# Altium PCB DD_Current_Sense.PcbDoc
Units mil, origin at the board's own origin, x right, y up, seen from the top; angles counter-clockwise.
Board outline 6000 x 4000 mil, 2 copper layers (Top Layer, Bottom Layer); 60 components, 30 nets, 169 pads, 12 vias.
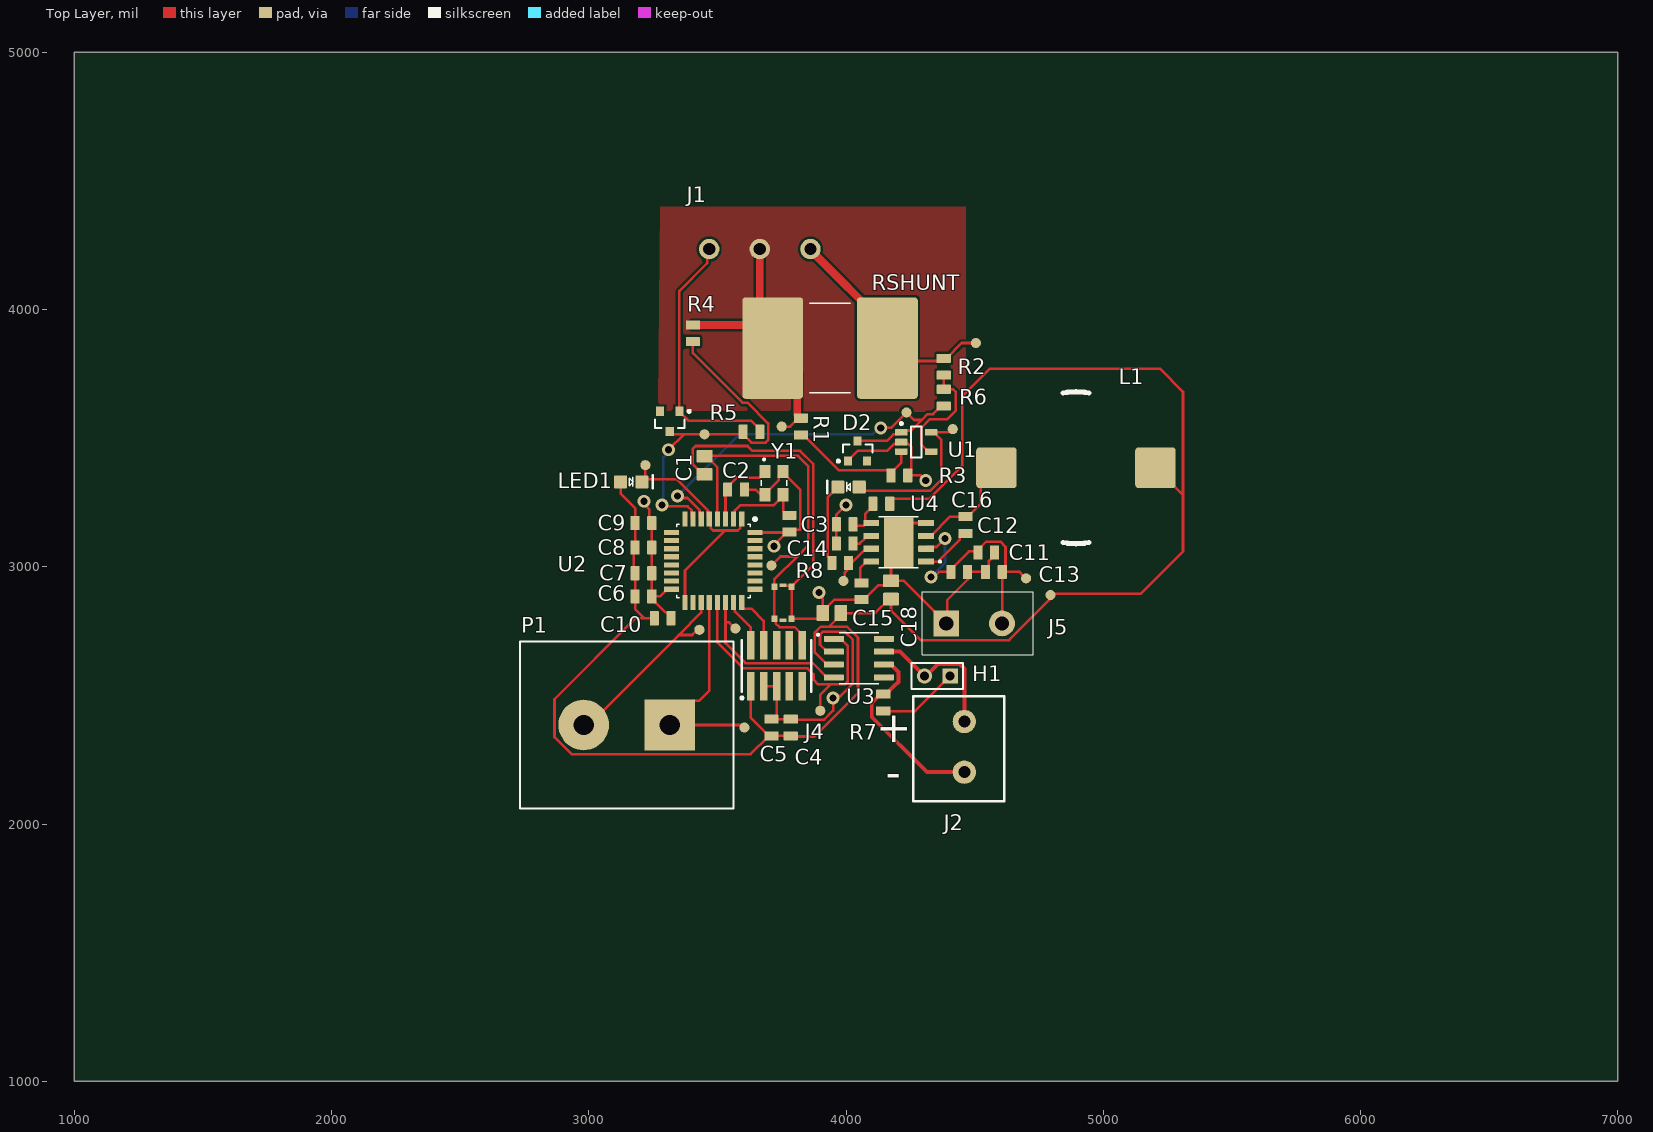
[diagram p0: Top Layer view]
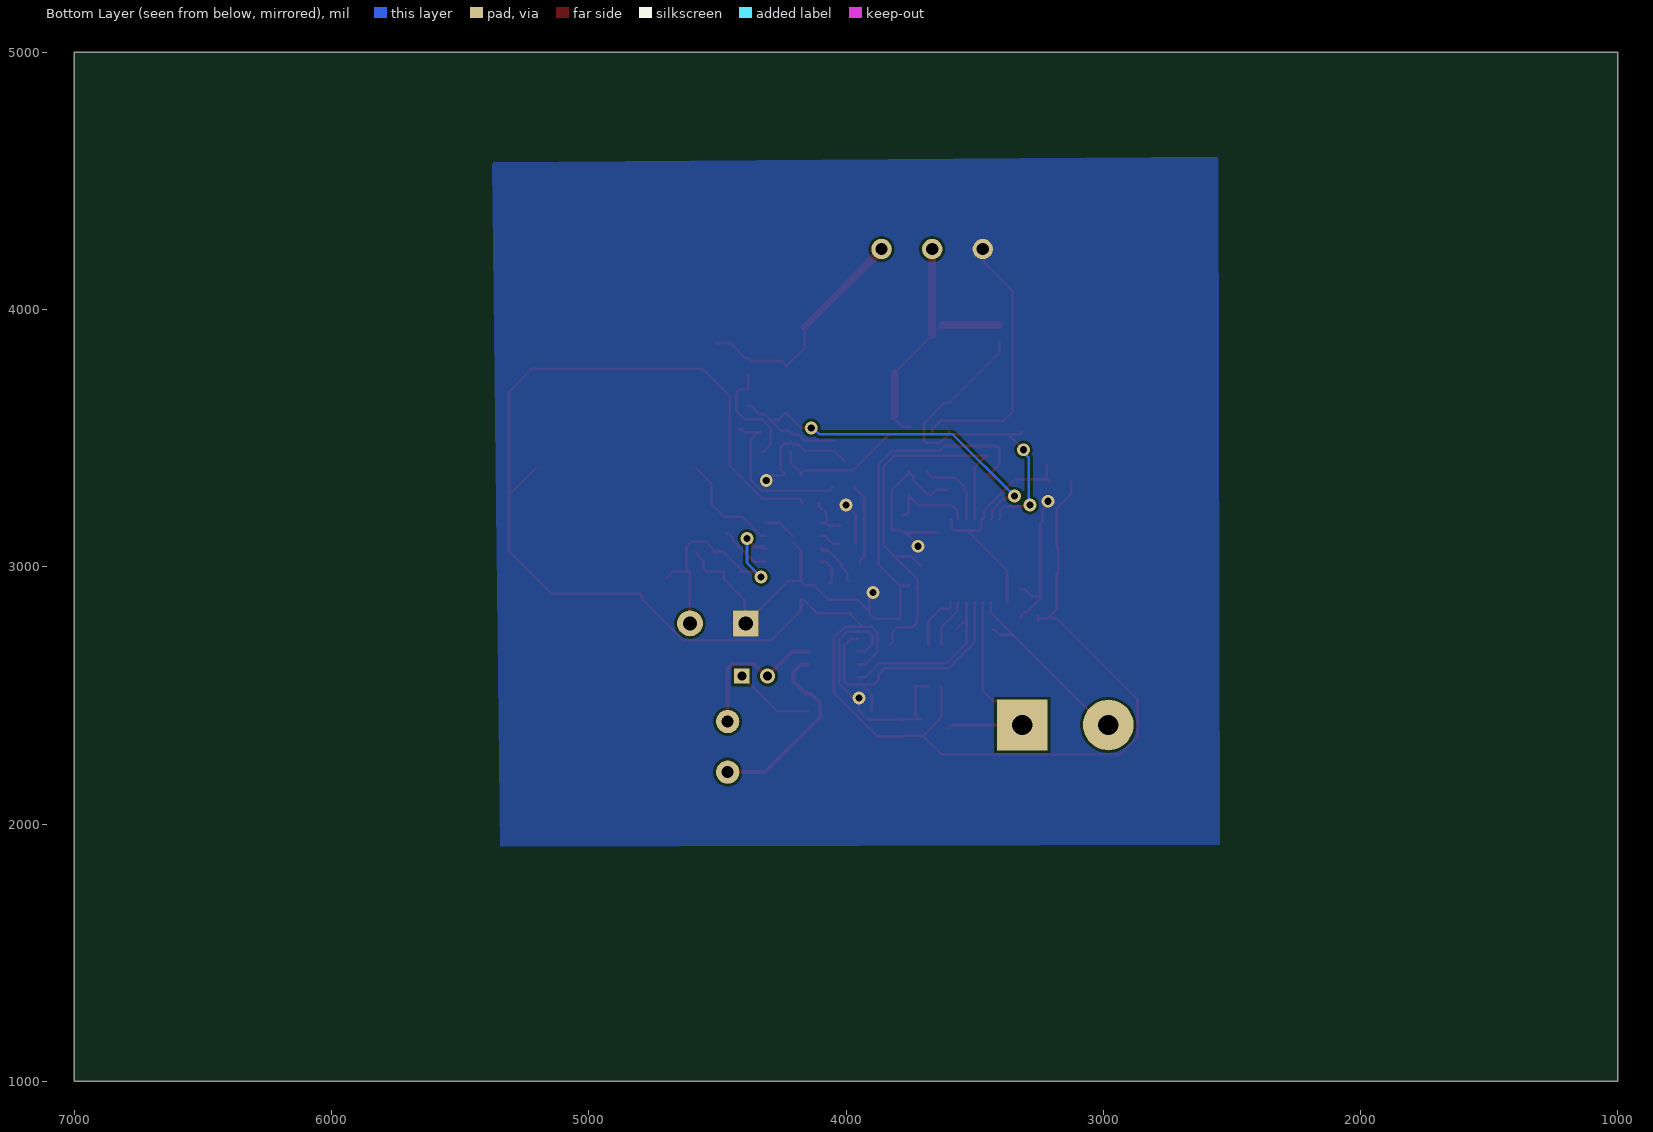
[diagram p1: Bottom Layer view, seen from below]
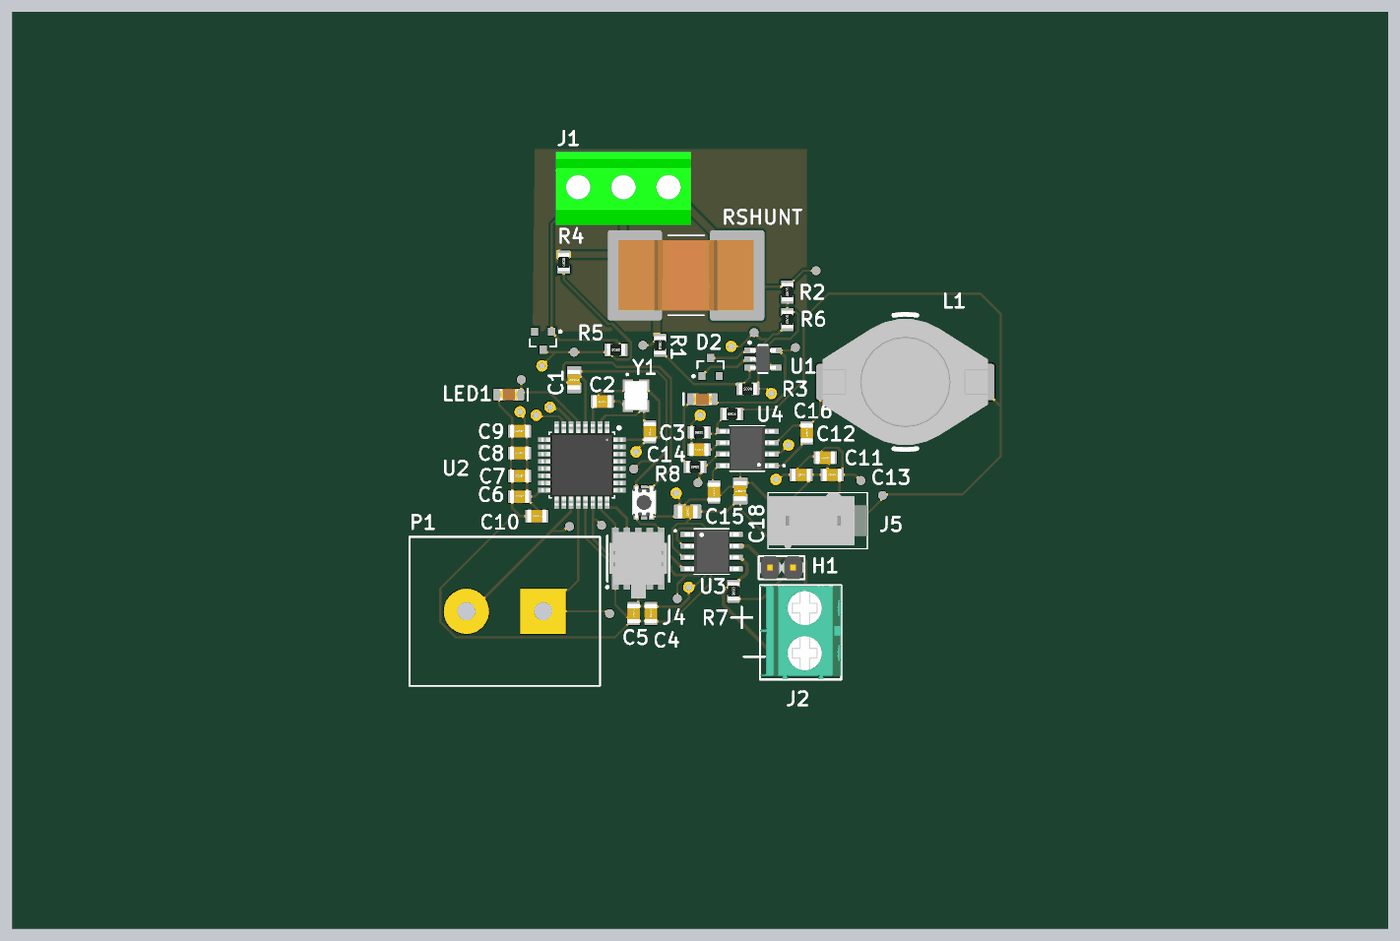
[diagram p2: 3D render of the assembled board from above, using the file's embedded part models]

## Layer stack, top to bottom
Top Solder: solder mask 0.4, Solder Resist, Dk 3.5
Top Layer: signal copper 1.4
Dielectric 1: dielectric 12.6, FR-4, Dk 4.8
Bottom Layer: signal copper 1.4
Bottom Solder: solder mask 0.4, Solder Resist, Dk 3.5

## Board outline
1000,1000 7000,1000 7000,5000 1000,5000

## Design rules (kind name [scope] priority, off if disabled: settings)
Clearance [All] p1: gap=10 ignorepadtopadclearanceinfootprint=FALSE
DiffPairsRouting [All] p1: maxlimit=10 minlimit=10 mostfreqgap=10 toplayer_minwidth=15 toplayer_maxwidth=15 toplayer_prefwidth=15 bottomlayer_minwidth=15 bottomlayer_maxwidth=15 bottomlayer_prefwidth=15 maxuncoupledlength=500
PolygonConnect [InNet('VBAT')] p1: connectstyle=Direct reliefconductorwidth=10 reliefentries=4 polygonreliefangle="90 Angle" airgapwidth=10
RoutingVias [All] p1: holewidth=28 width=50 viastyle="Through Hole" minholewidth=28 minwidth=50 maxholewidth=28 maxwidth=50
SolderMaskExpansion [All] p1: expansion=4 istentingtop=FALSE
SupplyNets "Schematic Supply Nets_5" [InNet('VOUT')] p1: voltage=0.000
SupplyNets "Schematic Supply Nets_4" [InNet('VIN')] p2: voltage=0.000
SupplyNets "Schematic Supply Nets_3" [InNet('5V')] p3: voltage=0.000
SupplyNets "Schematic Supply Nets_2" [InNet('GND')] p4: voltage=0.000
SupplyNets "Schematic Supply Nets_1" [InNet('VBAT')] p5: voltage=0.000
SupplyNets "Schematic Supply Nets" [InNet('3V3')] p6: voltage=0.000
Width [All] p1: maxlimit=10 minlimit=10 preferedwidth=10
29 further rules are at their usual default settings.

## Classes and differential pairs
component class Power: C11 C12 C13 C14 C15 C16 C18 J5 L1 R8 U4
component class MCU: C1 C3 C4 C5 C6 C7 C8 C9 C10 H1 J2 J3 J4 LED1 P1 R7 U2 U3 Y1
component class DD_Current_Sense: D2 J1 R1 R2 R3 R4 R5 R6 RSHUNT U1
differential pair CAN: +CAN_P -CAN_N

## Components (designator, comment, footprint, x,y, rotation, side; value= is the part's Value field where it differs from the comment)
C1 "CAP_0.1uF_50V_0805" CAP2012 3450,3394.76 r90 top value=0.1μF
C2 "CAP_14pF_50V_0805" CAP0805 3572.48,3300 r0 top value=14pF
C3 "CAP_14pF_50V_0805" CAP0805 3780,3167.52 r270 top value=14pF
C4 "CAP_0.1uF_50V_0805" CAP0805 3785,2375 r270 top value=0.1μF
C5 "CAP_0.1uF_50V_0805" CAP0805 3710,2375 r270 top value=0.1μF
C6 "CAP_100nF_50V_0805" CAP0805 3212.48,2885 r0 top value=100nF
C7 "CAP_4.7uF_16V_0805" CAP0805 3212.48,2975 r0 top value=4.7μF
C8 "CAP_100nF_50V_0805" CAP0805 3212.48,3075 r0 top value=100nF
C9 "CAP_100nF_50V_0805" CAP0805 3212.52,3170 r0 top value=100nF
C10 "CAP_1uF_16V_0805" CAP0805 3287.48,2800 r0 top value=1μF
C11 "CAP_10uF_16V_0805" CAP0805 4545,3055 r180 top value=10μF
C12 "CAP_10uF_16V_0805" CAP0805 4440,2980 r180 top value=10μF
C13 "CAP_0.1uF_50V_0805" CAP0805 4575,2980 r0 top value=0.1μF
C14 "CAP_0.47uF_25V_0805" CAP0805 3995,3090 r0 top value=0.47µF
C15 "CAP_8200pF_50V_0805" CAP0805 4060,2905 r90 top
C16 "CAP_0.1uF_50V_0805" CAP0805 4465,3162.52 r270 top value=0.1μF
C17 "CAP_22uF_16V_0805" CAP2012 3945,2820 r180 top value=22μF
C18 "CAP_22uF_16V_0805" CAP2012 4175,2909.76 r90 top value=22μF
D1 "BZX84C5V1LT1G" ONSC-SOT-23-3-318-08_V 3315,3565 r270 top
D2 "BZX84C5V1LT1G" ONSC-SOT-23-3-318-08_V 4045,3450 r90 top
H1 "HEADER" HDR1X2 4405,2575 r180 top
J1 "CONN_TERMINAL_3" WJ127-5.0-3P 3665,4235 r0 top
J2 "CON_2POS_SCREW_TERM" 1935161 4460,2300 r270 top
J4 "CON_PROGRAMMING" FTSH-105-01-F-DV-K-P-TR 3730,2615 r0 top
J5 "CONN_0039293026" 0039293026 4390,2780 r0 top
L1 "IND_2.2uH_9A" IND_BOURNS_SDR1806 4894.05,3385 r0 top
LED1 "LED_RED" LED_0805_RED 3165,3330 r0 top
LED2 "LED_RED" LED_0805_RED 4010,3310 r180 top
P1 "CONN_TERMINAL_2" OSTYK51102030 3147.68,2385 r180 top
R1 "RES_100Ω_0805_1%" RES0805 3825,3545 r270 top value=100Ω
R2 "RES_100Ω_0805_1%" RES0805 4380,3777.48 r90 top value=100Ω
R3 "RES_9.1kΩ_0805_5%" RES0805 4207.52,3355 r180 top value=9.1kΩ
R4 "RES_100kΩ_0805_0.5%" RES0805 3405,3907.48 r90 top value=100kΩ
R5 "RES_9.1kΩ_0805_5%" RES0805 3632.48,3525 r180 top value=9.1kΩ
R6 "RES_9.1kΩ_0805_5%" RES0805 4380,3657.48 r90 top value=9.1kΩ
R7 "RES_120Ω_0805_1%" RES0805 4145,2472.48 r270 top value=120Ω
R8 "RES_10kΩ_0805_5%" RES0805 3977.48,3015 r0 top value=10kΩ
R9 "RES_22.1kΩ_0805_1%" RES0805 3995,3165 r0 top value=22.1kΩ
R10 "RES_73.2kΩ_0805_1%" RES0805 4137.48,3245 r0 top value=73.2kΩ
RSHUNT "RES_1mΩ_5931_1%" RES-5931 3938,3850 r0 top value=1mΩ
S1 "SW_PUSHBUTTON" TACTILE_SWITCH_SMD 3755,2860 r270 top
"TP 1" "TESTPOINT_1MM_CIRCLE" TESTPOINT_CIRCLE_1MM 3750,3545 r90 top
"TP 2" "TESTPOINT_1MM_CIRCLE" TESTPOINT_CIRCLE_1MM 4505,3870 r90 top
"TP 3" "TESTPOINT_1MM_CIRCLE" TESTPOINT_CIRCLE_1MM 3450,3515 r90 top
"TP 4" "TESTPOINT_1MM_CIRCLE" TESTPOINT_CIRCLE_1MM 4415,3535 r90 top
"TP 5" "TESTPOINT_1MM_CIRCLE" TESTPOINT_CIRCLE_1MM 4235,3600 r90 top
"TP 7" "TESTPOINT_1MM_CIRCLE" TESTPOINT_CIRCLE_1MM 3900,2440 r90 top
"TP 8" "TESTPOINT_1MM_CIRCLE" TESTPOINT_CIRCLE_1MM 3570,2760 r90 top
"TP 9" "TESTPOINT_1MM_CIRCLE" TESTPOINT_CIRCLE_1MM 3605,2375 r90 top
"TP 10" "TESTPOINT_1MM_CIRCLE" TESTPOINT_CIRCLE_1MM 3710,3005 r90 top
"TP 11" "TESTPOINT_1MM_CIRCLE" TESTPOINT_CIRCLE_1MM 3220,3395 r90 top
"TP 13" "TESTPOINT_1MM_CIRCLE" TESTPOINT_CIRCLE_1MM 3430,2755 r90 top
"TP 14" "TESTPOINT_1MM_CIRCLE" TESTPOINT_CIRCLE_1MM 4700,2955 r90 top
"TP 16" "TESTPOINT_1MM_CIRCLE" TESTPOINT_CIRCLE_1MM 3990,2945 r90 top
"TP 19" "TESTPOINT_1MM_CIRCLE" TESTPOINT_CIRCLE_1MM 4795,2890 r0 top
U1 "OPAMP_OPA313IDBVR" DBV0005A_M 4273.07,3485 r0 top
U2 "STM32F042K6T6TR" LQFP-32 3484.25,3023 r270 top
U3 "TCAN332DR" SOIC127P599X175-8N 4050,2645 r0 top
U4 "TPS54339" VREG_LM5017MR/NOPB 4205,3095 r180 top
Y1 "CRYSTAL_25MHZ_20PF" XTAL_ECS-250-20-33-CKM-TR 3720,3325 r270 top

## Footprints (in the part's own frame and the unit in brackets; to place one, negate y for a bottom-side part, rotate by r counter-clockwise, add the part's x,y. Pads: shape width x height; smd on the part's side, far side on the other; paste and mask are expansions set on the pad)
1935161 [mm] "TERM BLK 2POS SIDE ENTRY 5MM PCB"
  round 2.3 hole 1.2: 1(-2.5,0) 2(2.5,0)
  silkscreen extent -5.01,-5.06 5.39,3.94, body extent -5.01,-5.06 5.39,3.94, height 11.41
0039293026 [mm]
  rect 2.55x2.55 hole 1.4: 1(0,0)
  round 2.55 hole 1.4: 2(5.5,0)
  silkscreen extent -2.4,-3.1 8.6,3.1, body extent -2.4,-3.1 8.6,3.1, height 12.8
CAP0805 [mm] "Chip Capacitor, Body 2.0x1.2mm, Height 0.45mm, IPC Medium Density"
  rrect15% 0.9x1.4 smd: 1(-0.825,0) 2(0.825,0)
  body extent -1.1,-0.73 1.1,0.73, height 1.39
CAP2012 [mm]
  rrect20% 1.25x1.6 smd: 1(-0.895,0) 2(0.895,0)
  body extent -1.1,-0.7 1.1,0.75, height 1.41
DBV0005A_M [mm] "SOT23, 5-Leads, Body 3.05x1.75mm, Pitch 0.95mm, IPC Low Density"
  rrect15% 1.2x0.65 smd: 1(-1.475,0.95) 2(-1.475,0) 3(-1.475,-0.95) 4(1.475,-0.95) 5(1.475,0.95)
  silkscreen extent -1.6,-1.55 0.5,1.95, body extent -1.42,-1.46 1.42,1.46, height 1.08
FTSH-105-01-F-DV-K-P-TR [mil] "Samtec programming header 10 positions"
  rect 29x110 smd mask+2: 1(-100,-80) 2(-100,80) 3(-50,-80) 4(-50,80) 5(0,-80) 6(0,80) 7(50,-80) 8(50,80) 9(100,-80) 10(100,80)
  silkscreen extent -140,-130 135,100, body extent -125,-175 125,115, height 276
HDR1X2 [mm] "Connector; Header; 2 Position"
  rect 1.5x1.5 hole 0.9: 1(0,0)
  round 1.5 hole 0.9: 2(2.54,0)
  silkscreen extent -1.27,-1.27 3.81,1.27, body extent -1.27,-1.27 3.81,1.27, height 6.35
IND_BOURNS_SDR1806 [mm]
  rrect15% 4x4 smd mask+0.2: 1(-7.85,0) 2(7.85,0)
  silkscreen extent -1.27,-7.5 1.27,7.5, body extent -9.15,-7 9.15,7, height 6.6
LED_0805_RED [mm] "SMD, 2-Leads, Body 2x1.25mm"
  rrect20% 1.3x1.3 smd: 1(-1.05,0) 2(1.05,0)
  silkscreen extent -0.18,-0.64 2.11,0.64, body extent -1,-0.62 1,0.63, height 1.12
LQFP-32 [mil]
  rect 58x20 smd paste+0 mask+0: 1(-162,110.24) 2(-162,78.74) 3(-162,47.24) 4(-162,15.75) 5(-162,-15.75) 6(-162,-47.24) 7(-162,-78.74) 8(-162,-110.24) 17(162,-110.24) 18(162,-78.74) 19(162,-47.24) 20(162,-15.75) 21(162,15.75) 22(162,47.24) 23(162,78.74) 24(162,110.24)
  rect 20x58 smd paste+0 mask+0: 9(-110.24,-162) 10(-78.74,-162) 11(-47.24,-162) 12(-15.75,-162) 13(15.75,-162) 14(47.24,-162) 15(78.74,-162) 16(110.24,-162) 25(110.24,162) 26(78.74,162) 27(47.24,162) 28(15.75,162) 29(-15.75,162) 30(-47.24,162) 31(-78.74,162) 32(-110.24,162)
  silkscreen extent -168,-143 143,168, body extent -177,-177 177,177, height 63
ONSC-SOT-23-3-318-08_V [mm] "SOT23, 3-Leads, Body 2.92x1.3mm, Pitch 0.95mm"
  rect 0.9x0.8 smd: 1(-1,0.95) 2(-1,-0.95) 3(1,0)
  silkscreen extent -1.12,-1.46 0.65,2.03, body extent -0.65,-1.46 0.65,1.46, height 1.11
OSTYK51102030 [mm] "Connector; Header; 2 Position"
  rect 5x5 hole 2: 1(-4.25,0)
  round 5 hole 2: 2(4.25,0)
  silkscreen extent -10.55,-8.25 10.55,8.25
RES0805 [mm] "Chip Resistor, 2-Leads, Body 2.00x1.25mm, IPC High Density"
  rrect15% 0.9x1.4 smd: 1(-0.825,0) 2(0.825,0)
  body extent -1,-0.62 1,0.63, height 0.61
RES-5931 [mm]
  rrect10% 6x10 smd paste+0 mask+0: 1(-5.664,0) 2(5.664,0)
  silkscreen extent -2,-4.43 2,4.43, body extent -7.5,-3.87 7.5,3.88, height 2.36
SOIC127P599X175-8N [mm]
  rrect25% 1.97x0.6 smd: 1(-2.47,1.905) 2(-2.47,0.635) 3(-2.47,-0.635) 4(-2.47,-1.905) 5(2.47,-1.905) 6(2.47,-0.635) 7(2.47,0.635) 8(2.47,1.905)
  silkscreen extent -4.14,-2.52 1.95,2.52, body extent -3,-2.45 3,2.45, height 1.75
TACTILE_SWITCH_SMD [mm]
  rrect15% 0.65x0.6 smd: 1(-1.575,0.85) 2(1.575,0.85) 3(-1.575,-0.85) 4(1.575,-0.85)
  rrect15% 0.35x0.7 smd: 5(-1.725,0) 6(1.725,0)
  body extent -1.75,-1.35 1.75,1.35, height 1.6
TESTPOINT_CIRCLE_1MM [mm]
  round 1 smd: 1(0,0)
VREG_LM5017MR/NOPB [mm]
  rrect5% 1.55x0.6 smd mask+0: 1(-2.7,1.905) 2(-2.7,0.635) 3(-2.7,-0.635) 4(-2.7,-1.905) 5(2.7,-1.905) 6(2.7,-0.635) 7(2.7,0.635) 8(2.7,1.905)
  rect 2.95x4.9 smd paste-3 mask+0: 9(0,0)
  silkscreen extent -4.17,-2.52 1.95,2.52, body extent -3,-2.45 3,2.45, height 1.7
WJ127-5.0-3P [mm] "3 pin screw terminal"
  round 2.02 hole 1.2: 1(-5,0) 2(0,0) 3(5,0)
  body extent -7.5,-4.22 7.5,3.88, height 10.1
XTAL_ECS-250-20-33-CKM-TR [mm]
  rect 1.3x1.1 smd: 1(-1.15,-0.9) 2(1.15,-0.9) 3(1.15,0.9) 4(-1.15,0.9)
  silkscreen extent -2.45,-1.25 0.27,1.25, body extent -1.62,-1.25 1.58,1.25, height 0.8

## Part data
C1 C4 C5 C13 C16: "CAP CER 0.1UF 50V X7R 0805", Dielectric=X7R, LCSC Part #=C49678, Manufacturer 1="Murata Electronics", Manufacturer Part Number 1=GCM21BR71H104KA37K, Package/Footprint=0805, Supplier Part Number 1=490-8049-1-ND, Voltage Rating=50V, Mounting Type=SMD, Supplier 1=Digi-Key
C2 C3: "CERAMIC CAP MLCC HIGH-Q 125C", Manufacturer="Murata Electronics", Manufacturer Part Number=GQM2195C2E140JB12D, Package=0805, Supplier Part Number 1=490-GQM2195C2E140JB12DCT-ND, Voltage Rating=250V, Mounting Type=SMD, Supplier 1=Digi-Key
C6 C8 C9: "CAP CER 0.1UF 50V X7R 0805", Manufacturer 1="Samsung Electro-Mechanics", Manufacturer Part Number 1=CL21B104KBCNNNC, Package/Footprint=0805, Supplier Part Number 1=1276-1003-1-ND, Voltage Rating=50V, Supplier 1=Digi-Key
C7: "CAP CER 4.7UF 16V X5R 0805", Dielectric=X5R, LCSC Part #=C1779, Manufacturer 1="Samsung Electro-Mechanics", Manufacturer Part Number 1=CL21A475KOFNNNE, Package=0805, Supplier Part Number 1=1276-1065-1-ND, Voltage Rating=16V, Mounting Type=SMD, Supplier 1=Digi-Key
C10: "CAP CER 1UF 16V X7R 0805", Dielectric=X7R, Manufacturer 1=Yageo, Manufacturer Part Number 1=CC0805KKX7R7BB105, Package=0805, Supplier Part Number 1=311-1365-1-ND, Voltage Rating=16V, Mounting Type=SMD, Supplier 1=Digi-Key
C11 C12: "CAP CER 10UF 16V X5R 0805", Dielectric=X5R, Manufacturer 1=Yageo, Manufacturer Part Number 1=CC0805KKX5R7BB106, Package/Footprint=0805, Supplier Part Number 1=311-1865-1-ND, Voltage Rating=16V, Mounting Type=SMD, Supplier 1=Digi-Key
C14: "CAP CER 0.47UF 25V X5R 0805", Manufacturer 1=KEMET, Manufacturer Part Number 1=C0805C474K3PAC7800, Package=0805, Supplier Part Number 1=399-15508-1-ND, Voltage Rating=25V, Supplier 1=Digi-Key
C15: "CAP CER 8200PF 50V X7R 0805", Capacitance=8200pF, Dielectric=X7R, Manufacturer=YAGEO, Manufacturer Part Number=CC0805KRX7R9BB822, Package=0805, Supplier Part Number 1=311-4331-1-ND, Voltage Rating=50V, Mounting Type=SMD, Supplier 1=Digi-Key
C17 C18: "CAP CER 22UF 16V X5R 0805", Dielectric=X5R, Manufacturer 1="Murata Electronics", Manufacturer Part Number 1=GRM219R61C226ME15L, Package/Footprint=0805, Supplier Part Number 1=490-9952-1-ND, Voltage Rating=16V, Mounting Type=SMD, Supplier 1=Digi-Key
D1 D2: library part CMP-1060-00946-1, "Zener Voltage Regulator, 225 mW, 3-Pin SOT-23, Pb-Free, Tape and Reel", Manufacturer="On Semiconductor", ComponentLink1Description="Manufacturer URL", ComponentLink1URL=http://www.onsemi.com/, ComponentLink2Description=Datasheet, ComponentLink2URL=http://www.onsemi.com/pub_link/Collateral/BZX84C2V4LT1-D.PDF, ComponentLink3Description="Package Specification", ComponentLink3URL=http://www.onsemi.cn/pub_link/Collateral/318-08.PDF, DatasheetVersion="Rev. 17", Mounting Technology="Surface Mount", PackageDescription="3-Pin Small Outline Transistor, Body 2.92 x 1.3 mm, Pitch 0.95 mm", PackageReference=SOT-23-3-318-08, PackageVersion="Rev. AP, 11/2009", Packing="Tape and Reel", PartNumber=BZX84C5V1LT1G, RoHS=Pb-Free
H1: "HEADER 2X1", Manufacturer 1="Harwin Inc.", Manufacturer Part Number 1=M20-9990246, Package/Footprint=TH, Supplier Part Number 1=952-2262-ND, Mounting Type=TH, Supplier 1=Digi-Key
J1: "Header, 3-Pin", LCSC Number=C8393, Manufacturer 1="Ningbo Kangnex", Manufaturer Part Number 1=WJ127-5.0-3P, Datasheet=https://datasheet.lcsc.com/lcsc/2107141401_Ningbo-Kangnex-Elec-WJ127-5-0-3P_C8393.pdf, Supplier 1=LCSC
J2: "TERM BLK 2POS SIDE ENTRY 5MM", Manufacturer 1="Phoenix Contact", Manufacturer Part Number 1=1935161, Package/Footprint=SMD, Supplier Part Number 1=277-1667-ND, Mounting Type=TH, Supplier 1=Digi-Key
J4: "CONN HEADER SMD 10POS 1.27MM", Manufacturer 1=Samtec, Manufacturer Part Number 1=FTSH-105-01-F-DV-K, Supplier Part Number 1=SAM8796-ND, Mounting Type=SMD, Pitch=1.27mm, Supplier 1=Digi-Key
J5: "CONN HEADER VERT 2POS MINI-FIT", Manufacturer 1=Molex, Manufacturer Part Number 1=0039293026, Package/Footprint=TH, Supplier Part Number 1=WM3843-ND, Family="Mini-Fit Jr", Mounting Type=TH, Supplier 1=Digi-Key, Verified=No
L1: "INDUCTOR 2.2UH 9A 6.8 MOHM SMD", Current Rating=9A, DC Resistance (DCR)=6.8mOhm, Inductance=2.2μH, Manufacturer 1=Bourns, Manufacturer Part Number 1=SDR1806-2R2ML, Supplier Part Number 1=SDR1806-2R2MLCT-ND, Mounting Type=SMD, Supplier 1=Digi-Key
LED1 LED2: "LED RED DIFFUSED 0805 SMD", Forward Current=20mA, Forward Voltage Drop=2V, Manufacturer 1=OSRAM, Manufacturer Part Number 1="LS R976-NR-1", Package/Footprint=0805, Supplier Part Number 1=475-1278-1-ND, Mounting Type=SMD, Supplier 1=Digi-Key
P1: "Header, 2-Pin", Manufacturer 1="On Shore Technology Inc.", Manufacturer Part Number 1=OSTYK51102030, Supplier Part Number 1=ED2953-ND, Supplier 1=Digi-Key
R1 R2: "RES 100 OHM 1% 1/8W 0805", LCSC Part #=C1790, Manufacturer 1="Vishay Dale", Manufacturer Part Number 1=CRCW0805100RFKEA, Package/Footprint=0805, Supplier Part Number 1=541-100CCT-ND, Mounting Type=SMD, Supplier 1=Digi-Key
R3 R5 R6: "RES 9.1K OHM 5% 1/8W 0805", Manufacturer 1=Yageo, Manufacturer Part Number 1=RC0805JR-079K1L, Package=0805, Supplier Part Number 1=311-9.1KARCT-ND, Tolerance=5%, Supplier 1=Digi-Key
R4: "RES 100K OHM 0.5% 1/8W 0805", Manufacturer 1=Panasonic, Manufacturer Part Number 1=ERA-6AED104V, Supplier Part Number 1=P123795CT-ND, Supplier 1=Digi-Key
R7: "RES 120 OHM 1% 1/8W 0805", LCSC Part #=C17437, Manufacturer 1=Vishay, Manufacturer Part Number 1=CRCW0805120RFKEA, Package/Footprint=0805, Supplier Part Number 1=541-120CCT-ND, Mounting Type=SMD, Supplier 1=Digi-Key
R8: "RES 10K OHM 5% 1/8W 0805", LCSC Part #=C17414, Manufacturer 1="Panasonic Electronic Components", Manufacturer Part Number 1=ERJ-6GEYJ103V, Package/Footprint=0805, Supplier Part Number 1=P10KACT-ND, Mounting Type=SMD, Supplier 1=Digi-Key
R9: "RES 22.1K OHM 1% 1/8W 0805", Manufacturer 1="Vishay Dale", Manufacturer Part Number 1=CRCW080522K1FKEA, Supplier Part Number 1=541-22.1KCCT-ND, Supplier 1=Digi-Key
R10: "RES 73.2K OHM 1% 1/8W 0805", Manufacturer 1=Yageo, Manufacturer Part Number 1=RC0805FR-0773K2L, Package/Footprint=0805, Supplier Part Number 1=311-73.2KCRCT-ND, Mounting Type=SMD, Supplier 1=Digi-Key
RSHUNT: "RES 0.001 OHM 1% 10W 5931", Manufacturer 1="Vishay Dale", Manufacturer Part Number 1=WSLP59311L000FEA, Package=5931, Supplier Part Number 1=541-10012-1-ND, Mounting Type=SMD, Supplier 1=Digi-Key
S1: "SMT 3.0 X 2.6 MM TACT SWITCH WIT", Manufacturer 1="Würth Elektronik", Manufacturer Part Number 1=435151014824, Supplier Part Number 1=732-435151014824CT-ND, Supplier 1=Digi-Key
"TP 1" "TP 2" "TP 3" "TP 4" "TP 5" "TP 7" "TP 8" "TP 9" "TP 10" "TP 11" "TP 13" "TP 14" "TP 16" "TP 19": "TESTPOINT 1MM CIRCLE"
U1: "IC OPAMP GP 1 CIRCUIT SOT23-5", Manufacturer 1="Texas Instruments", Manufacturer Part Number 1=OPA313IDBVR, Package=SOT-23-5, Supplier Part Number 1=296-35607-1-ND, Mounting Type=SMD, Supplier 1=Digi-Key, Verified=No
U2: "ARM® Cortex®-M0 STM32F0 Microcontroller IC 32-Bit Single-Core 48MHz 32KB (32K x 8) FLASH 32-LQFP (7x7)", Mfr_Name=STMicroelectronics, Operating Temperature="-40°C ~ 85°C (TA)", Package / Case=32-LQFP, Supplier Part Number 1=16AC3527, Voltage - Supply (Vcc/Vdd)="2V ~ 3.6V", ComponentLink1Description=digikey, ComponentLink1URL=https://www.digikey.com/en/products/detail/stmicroelectronics/STM32F042K6T6TR/10414582, Core Processor="ARM® Cortex®-M0", Core Size="32-Bit Single-Core", Program Memory Size="32KB (32K x 8)", Speed=48MHz, Supplier 1=Avnet
U3: "IC CAN TRANSCEIVER", Manufacturer 1="Texas Instruments", Supplier Part Number 1=296-43711-1-ND, Manufacturer Part Number 1=TCAN332DR, Supplier 1=Digi-Key
U4: "IC REG BUCK ADJUSTABLE 3A 8SOPWR", Input Voltage (Max)=23V, Input Voltage (Min)=4.5V, Manufacturer 1="Texas Instruments", Manufacturer Part Number 1=TPS54339DDAR, Output Current=3A, Output Voltage (Max)=7V, Output Voltage (Min/Fixed)=0.76V, Package=8-PowerSOIC, Supplier Part Number 1=296-35686-1-ND, Switching Frequency=600kHz, Supplier 1=Digi-Key
Y1: "CRYSTAL 25.0000MHZ 20PF SMD", Frequency=25MHz, Load Capacitance=20pF, Manufacturer 1="ECS Inc.", Manufacturer Part Number 1=ECS-250-20-33-CKM-TR, Package/Footprint=SMD, Supplier Part Number 1=XC1817CT-ND, Mounting Type=SMD, Supplier 1=Digi-Key

## Via types
v1: diameter 50, hole 28, Top Layer to Bottom Layer, 12 vias

## Nets (pads, with @x,y where several pads share a name; then routed paths per layer and width w, separated by ;. In a path a pad name is that pad's centre, name@x,y a point inside that pad or via, vN(x,y) a via of type N, cw(c..) or ccw(c..) an arc to the next point about the centre after c; other vN are vias at no path point)
3V3: "TP 19.1" C4.2 C5.2 C6.1 C7.1 C8.1 C9.1 C10.1 C17.1 C18.1 J4.1 L1.2 LED1.1 R10.2 U3.3 | length 7376.2
  Top Layer w10: LED1.1@3125,3331.34 LED1.1 3123.66,3284.18 3180.04,3227.8 C9.1 ; C7.1@3175,2975 C7.1@3180,2970 ; C7.1@3175,2980 3175,3075 C8.1@3180.02,3080.02 ; C7.1 C7.1@3180,2970 ; C8.1 C9.1 ; C10.1@3255,2790.16 C10.1 ; C10.1@3255,2809.84 C10.1 ; J4.1 3630,2412.68 C5.2@3700.16,2342.52 ; U3.3 3925.79,2620 3878.98,2666.81 3878.98,2744.58 3901.21,2766.81 3930,2766.81 ; C17.1 4113.58,2820 4168.11,2874.53 C18.1 4175,2830 4290.2,2714.8 4633.54,2714.8 4789.38,2870.64 4789.38,2876.43 4795,2882.05 4795,2890 4800,2895 5145,2895 5310,3060 5310,3278.11 ; C17.1@3983.68,2816.56 3933.94,2766.81 3930,2766.81 ; R10.2 4169.96,3252.18 4182.68,3264.9 4324.75,3264.9 4451.09,3391.24 4451.09,3661.09 4560,3770 5220,3770 5310,3680 5310,3278.11 ; L1.2 5310,3278.11 ; C7.1@3180,2970 C6.1 3180,2835 3215,2800 ; 3215,2800 3181.93,2800 2866.93,2485 2866.93,2338.02 2933.37,2271.57 3629.21,2271.57 C5.2@3700.16,2342.52 ; 3215,2800 C10.1 ; C5.2@3700.16,2342.52 C5.2 3775,2342.52 3780,2337.52 C4.2 3787.48,2340.04 3877.38,2340.04 4046.54,2509.2 4046.54,2724.58 4004.3,2766.81 3930,2766.81
5V: "TP 4.1" LED2.1 U1.5 | length 627.5
  Top Layer w10: LED2.1 4066.34,3295 4326.57,3295 4369.76,3338.2 4369.76,3450 4370,3450.24 4370,3494.37 U1.5@4341.97,3522.4 ; U1.5 U1.5@4341.97,3522.4 ; 4415,3535 4407.05,3535 4394.45,3522.4 U1.5@4341.97,3522.4
CAN_N: J2.2 R7.1 U3.6 | length 769.7
  Top Layer w15: U3.6 4174.21,2620 4203.52,2590.69 4203.52,2552.67 4187.24,2536.39 4186.27,2536.39 4154.84,2504.96 R7.1 ; R7.1@4166.03,2509.96 4150,2509.96 R7.1 ; J2.2 4314.96,2201.57 4099.94,2416.59 4099.94,2469.74 4135.16,2504.96 R7.1
CAN_P: H1.2 J2.1 U3.7 | length 584.5
  Top Layer w15: U3.7 4210,2670 H1.2 4310.36,2575 4357.38,2622.03 4441.78,2622.03 4460,2603.8 J2.1
CAN_RX: "TP 7.1" U2.21 U3.1 | length 1069.6
  Top Layer w10: U2.21 3500,2706 3601,2605 3850.71,2605 3873.76,2581.95 3873.76,2561.24 3891.81,2543.19 3940,2543.19 ; 3900,2440 3900,2503.19 3940,2543.19 ; U3.1 3979.72,2720 4006.54,2693.19 4006.54,2553.71 3996.02,2543.19 3940,2543.19
CAN_TX: "TP 8.1" U2.22 U3.4 | length 683
  Top Layer w10: U2.22 3531.5,2784.23 ; 3570,2760 3569.41,2760 3545.18,2784.23 3531.5,2784.23 ; U3.4 3925.79,2570 3870.79,2625 3609.29,2625 3531.5,2702.79 3531.5,2784.23
GND: C1.1 C2.2 C3.2 C4.1 C5.1 C6.2 C7.2 C8.2 C9.2 C10.2 C11.1 C12.1 C13.1 C14.1 C15.1 C17.2 C18.2 D1.1 D2.1 J1.1 J4.3 J4.5 J5.1 R3.1 R5.1 R9.1 S1.1 S1.2 S1.5 U1.2 U2.16 U2.32 U3.2 U4.4 U4.9 Y1.2 Y1.4 | length 6875
  Top Layer w10: v1@3215,3260 v1(3215,3254.59) 3215,3243.76 3234.94,3223.82 3234.94,3180.06 C9.2 C6.2 3277.68,2885 3298.25,2905.57 3298.25,2907.76 3303.25,2912.76 U2.16 ; C6.2 3244.96,2875.16 3297.56,2822.56 3307.24,2822.56 3319.96,2809.84 C10.2 ; 3385,3569.8 3352.4,3602.4 D1.1 3352.4,4072 3460.64,4180.24 3460.64,4227.49 J1.1 ; 3386.65,3567.56 3632.24,3567.56 3664.96,3534.84 R5.1 ; C1.1@3425,3339.92 3444.61,3359.53 C1.1 ; C1.1@3443.11,3359.53 3403.5,3399.13 3403.5,3457.94 3415.17,3469.61 3617.27,3469.61 3636.01,3450.87 3821.58,3450.87 3872.68,3399.77 3872.68,3007.2 3788.46,2922.99 S1.1 ; C2.2 3648.94,3300 3672.11,3276.83 3675,3279.72 Y1.2 3684.57,3283.66 3738.78,3337.87 3738.78,3353.62 Y1.4 Y1.4@3755.43,3366.34 ; U2.32 3771.94,3133.24 3773.74,3135.04 C3.2 ; J4.3 J4.5 3730,2420.2 C5.1@3717.28,2407.48 ; C5.1 C5.1@3717.28,2407.48 ; v1@3710,3070 3710,3074.88 3770.16,3135.04 C3.2 ; Y1.4@3740.75,3351.65 Y1.4@3755.43,3366.34 ; S1.5 3756.89,2926.02 3784.45,2926.02 S1.1 ; S1.2@3788.46,2798.98 S1.2 ; v1(3895,2900) 3895,2889.18 3909.76,2874.41 C17.2@3909.76,2826.89 ; U3.2 3925.79,2670 3898.98,2696.81 3898.98,2736.29 3909.49,2746.81 3996.02,2746.81 4026.54,2716.29 4026.54,2545.42 3978.77,2497.65 3957.65,2497.65 v1(3950,2490) 3950,2440.95 3914.37,2405.31 3787.17,2405.31 C4.1 3780,2402.48 3775,2407.48 C5.1@3717.28,2407.48 ; C14.1 3962.52,3157.48 3958.76,3161.24 R9.1 3962.52,3202.52 v1(4000,3240) ; D2.1 4007.6,3412.6 4045.28,3450.28 4160.13,3450.28 4187.06,3477.2 4207.2,3477.2 U1.2 4222.8,3477.2 4241.9,3477.2 4253.62,3465.48 4253.62,3378.46 4240,3364.84 R3.1 4290,3355 v1(4310,3335) ; U4.9 4175,3065 C18.2 ; U4.9@4205,3116.93 4258.07,3170 U4.4 ; C13.1 C12.1 4474.96,2977.52 4474.96,2951.5 4393.66,2870.2 4393.66,2783.66 J5.1 4225,2945 C18.2 ; C13.1@4542.52,2985 4555.24,2997.72 4555.24,3022.91 4577.48,3045.16 C11.1 ; Y1.4@3755.43,3366.34 3822.56,3299.21 3822.56,3143.38 3788.34,3143.38 C3.2 ; S1.2 3890.16,2797.99 3909.76,2817.6 C17.2 C17.2@3909.76,2826.89 ; S1.2 S1.1 ; C17.2@3909.76,2826.89 3955.39,2872.52 C15.1 4069.84,2872.52 4125.14,2927.82 4157.82,2927.82 C18.2
  other v1: 3720,3080
NetC2_1: C2.1 U2.3 Y1.1 | length 300.3
  Top Layer w10: U2.3 3531.5,3291.5 C2.1 3540,3309.84 3576.28,3346.12 3664.35,3346.12 3684.57,3366.34 Y1.1
NetC3_1: C3.1 U2.2 Y1.3 | length 342.5
  Top Layer w10: U2.2 3567.99,3190 3567.99,3218.72 3588.2,3238.93 3718.57,3238.93 Y1.3@3755.43,3275.79 ; Y1.3 3755.43,3214.72 3770.16,3200 C3.1
NetC14_2: C14.2 U4.6 | length 83.8
  Top Layer w10: C14.2 4052.68,3090 4073.19,3110.51 4073.19,3113.19 4080,3120 U4.6@4097.27,3120
NetC15_2: C15.2 U4.8 | length 118.6
  Top Layer w10: C15.2@4065,2937.48 C15.2 4055,2942.48 4055,2995 4080,3020 U4.8
NetC16_1: C16.1 L1.1 U4.3 | length 430.2
  Top Layer w10: U4.3 4330,3120 4405,3195 C16.1 4474.84,3195 4523.07,3243.23 4523.07,3323.07 L1.1
NetC16_2: C16.2 U4.1 | length 206.1
  Top Layer w10: U4.1 4356.81,3020 4442.44,3105.63 4442.44,3117.32 4455.16,3130.04 C16.2
NetD1_3: "TP 3.1" D1.3 R4.1 R5.2 U2.7 | length 1412.1
  Top Layer w10: v1(3285,3240) 3290,3235 3384.23,3235 3400.51,3218.72 3400.51,3190 U2.7 ; v1(3310,3455) 3370,3515 ; D1.3 3315,3523.66 3323.66,3515 3370,3515 ; R4.1 3405,3830.74 3597.6,3638.15 3616.74,3638.15 3697.68,3557.22 3697.68,3492.78 3687.33,3482.44 3632.72,3482.44 3600,3515.16 R5.2 3590,3515 3450,3515 3370,3515
  Bottom Layer w10: v1(3285,3240) 3290,3245 3290,3425.5 3310,3445.5 v1(3310,3455) v1@3305,3450
NetD2_3: "TP 5.1" D2.3 R6.1 U1.1 U2.6 | length 1633.6
  Top Layer w10: v1(3345,3275) 3352.65,3267.35 3383.38,3267.35 3432.01,3218.72 3432.01,3190 U2.6 ; D2.3 4158.68,3489.37 4183.91,3514.61 4207.2,3514.61 U1.1 4222.27,3529.67 4253.62,3529.67 4294.47,3570.53 ; v1(4135,3540) 4175,3540 4235,3600 4264.47,3570.53 4294.47,3570.53 ; R6.1 4370.16,3625 4338.34,3593.18 4317.13,3593.18 4294.47,3570.53
  Bottom Layer w10: v1(3345,3275) 3585,3515 4103.43,3515 4128.43,3540 v1(4135,3540)
NetH1_1: H1.1 R7.2 | length 317.1
  Top Layer w10: R7.2 4146.37,2438.63 4268.63,2438.63 H1.1
NetLED1_2: "TP 11.1" LED1.2 U2.1 U2.5 U2.17 | length 944.5
  Top Layer w10: LED1.2 LED1.2@3216.34,3340 ; 3220,3395 3220,3343.66 LED1.2@3216.34,3340 ; U2.17 3374.02,2985.02 3530,3141 ; U2.1 3589.49,3180 3589.49,3151.28 3579.21,3141 3530,3141 ; LED1.2@3216.34,3340 3342.22,3340 3463.5,3218.72 3463.5,3190 U2.5 3473.5,3180 3473.5,3151.28 3483.79,3141 3530,3141
NetLED2_2: LED2.2 R8.1 | length 325.4
  Top Layer w10: R8.1 3945,3024.84 3929.8,3040.04 3929.8,3175 3928.66,3176.14 3928.66,3270 LED2.2@3963.66,3305 ; LED2.2@3963.66,3305 LED2.2 LED2.2@3963.66,3305
NetR1_2: R1.2 R3.2 U1.3 | length 528.6
  Top Layer w10: R1.2 3834.84,3512.52 3972.46,3374.9 4162.32,3374.9 4175.04,3362.18 R3.2 4175.04,3364.84 4215,3404.8 U1.3
NetR2_1: R2.1 R6.2 U1.4 | length 455.2
  Top Layer w10: U1.4 4320.31,3447.6 4292.52,3475.39 4292.52,3540.29 4325.41,3573.18 4393.11,3573.18 4426,3606.07 4426,3680.66 4416.7,3689.96 R6.2 R2.1
NetR8_2: "TP 16.1" R8.2 U4.7 | length 213.2
  Top Layer w10: 3990,2945 3995.62,2950.62 3995.62,2978.3 4017.48,3000.16 4017.48,3010 4017.56,3009.92 U4.7@4070.83,3063.19 ; U4.7@4070.83,3063.19 4077.64,3070 U4.7 4091.89,3063.19 U4.7@4070.83,3063.19
NetR9_2: R9.2 R10.1 U4.5 | length 173.7
  Top Layer w10: R9.2 4024.96,3162.48 4024.96,3158.8 4068.8,3158.8 4078.07,3168.07 U4.5@4078.07,3170 ; U4.5 4081.47,3170 4074.66,3176.81 4074.66,3204.82 4105,3235.16 R10.1
NRST: "TP 10.1" C1.2 J4.10 S1.3 S1.4 U2.4 | length 1638.1
  Top Layer w10: C1.2 3450.87,3430.87 3813.3,3430.87 3852.68,3391.49 3852.68,3082.68 3812.5,3042.5 ; C1.2@3456.89,3430 3500,3386.89 U2.4 ; 3710,3005 3745,3040 3810,3040 3812.5,3042.5 ; S1.3@3726.54,2917.01 S1.3 ; J4.10 3820.5,2704.5 3820.5,2745.21 3800.71,2765 3740.81,2765 3726.22,2779.59 3726.22,2793.31 S1.4 S1.3 ; S1.3 3721.54,2951.54 3812.5,3042.5
SWD_CLK: J4.4 U2.24 | length 221.1
  Top Layer w10: U2.24 3594.49,2842 3599.49,2837 3633,2837 3680,2790 J4.4
SWD_IO: J4.2 U2.23 | length 193.8
  Top Layer w10: U2.23 3567.99,2856 3567.99,2826.06 3630,2764.05 J4.2
USART_RX: "TP 9.1" P1.1 U2.20 | length 845.4
  Top Layer w10: U2.20 3468.5,2518.5 3428.43,2478.43 3408.43,2478.43 P1.1 3587.05,2385 3597.05,2375 3605,2375
USART_TX: "TP 13.1" P1.2 U2.19 | length 765
  Top Layer w10: P1.2 3000.35,2385 3350.18,2734.82 ; 3430,2755 3422.05,2755 3401.88,2734.82 3350.18,2734.82 ; U2.19 3437.01,2821.65 3350.18,2734.82
VBAT: "TP 1.1" J1.2 R1.1 R4.2 RSHUNT.1 | length 1070
  Top Layer w10: RSHUNT.1@3625.04,3939.96 3665,3900 RSHUNT.1 RSHUNT.1@3810.23,3754.77 ; 3750,3545 3782.68,3545 3815.16,3577.48 R1.1
  Top Layer w30: R4.2 RSHUNT.1@3625.04,3939.96 ; RSHUNT.1@3665,3900 J1.2 ; R1.1@3810.23,3590.2 RSHUNT.1@3810.23,3754.77
VIN: "TP 14.1" C11.2 C12.2 C13.2 J5.2 U4.2 | length 1074.2
  Top Layer w10: U4.2@4330,3070 U4.2 4318.11,3076.81 4351.81,3076.81 v1(4385,3110) ; v1@4332.52,2950 4362.52,2980 C12.2 4407.52,2989.84 4477.68,3060 4507.52,3060 C11.2 4512.52,3058.87 4512.52,3060 4512.52,3064.84 4545.24,3097.56 4599.85,3097.56 4620,3077.41 4620,2990 4617.48,2990 C13.2 ; C11.2@4499.8,3050.02 C11.2@4508.65,3058.87 ; J5.2 4607.3,2780.76 4607.3,2836.76 4607.48,2836.94 C13.2 ; 4700,2955 4675,2980 C13.2
  Bottom Layer w10: v1(4330,2960) 4385,3015 v1(4385,3110)
VOUT: "TP 2.1" J1.3 R2.2 RSHUNT.2 | length 919.2
  Top Layer w10: J1.3@3861.85,4231.44 J1.3 ; RSHUNT.2@4161,3932.3 RSHUNT.2 4231,3780 4251,3800 4370.04,3800 R2.2 4389.84,3809.96 4449.88,3870 4505,3870
  Top Layer w30: J1.3@3861.85,4231.44 RSHUNT.2@4161,3932.3
pads on no net: D1.2 D2.2 J4.6 J4.7 J4.8 J4.9 S1.6 U2.8 U2.9 U2.10 U2.11 U2.12 U2.13 U2.14 U2.15 U2.18 U2.25 U2.26 U2.27 U2.28 U2.29 U2.30 U2.31 U3.5 U3.8

## Polygon pours and split planes (outlines as drawn)
VBAT on Top Layer "VBAT_L01_P001" (solid, pour order 1): 3278.67,4400 3269.51,3607.45 4465,3602.45 4465,4400
GND on Bottom Layer "GND_L02_P002" (solid, pour order 2): 2390,4595 2552.41,4595 2547.86,1919.54 5344.28,1911.06 5376.13,4572.62

## Text inside footprints (layer, text, board x,y; h text height)
J2: Top Overlay "-" at 4155,2141.02 h120; Top Overlay "+" at 4135.01,2439 h120 r270
U2: Mechanical 13 "*" at 3585.24,3158.5 h50 r270